# Altium PCB UKU205.PcbDoc (part 1 of 3)
Units mm, origin at the board's own origin, x right, y up, seen from the top; angles counter-clockwise.
Board outline 374.65 x 264.35 mm, 2 copper layers (Top Layer, Bottom Layer); 276 components, 443 nets, 1000 pads, 796 vias.
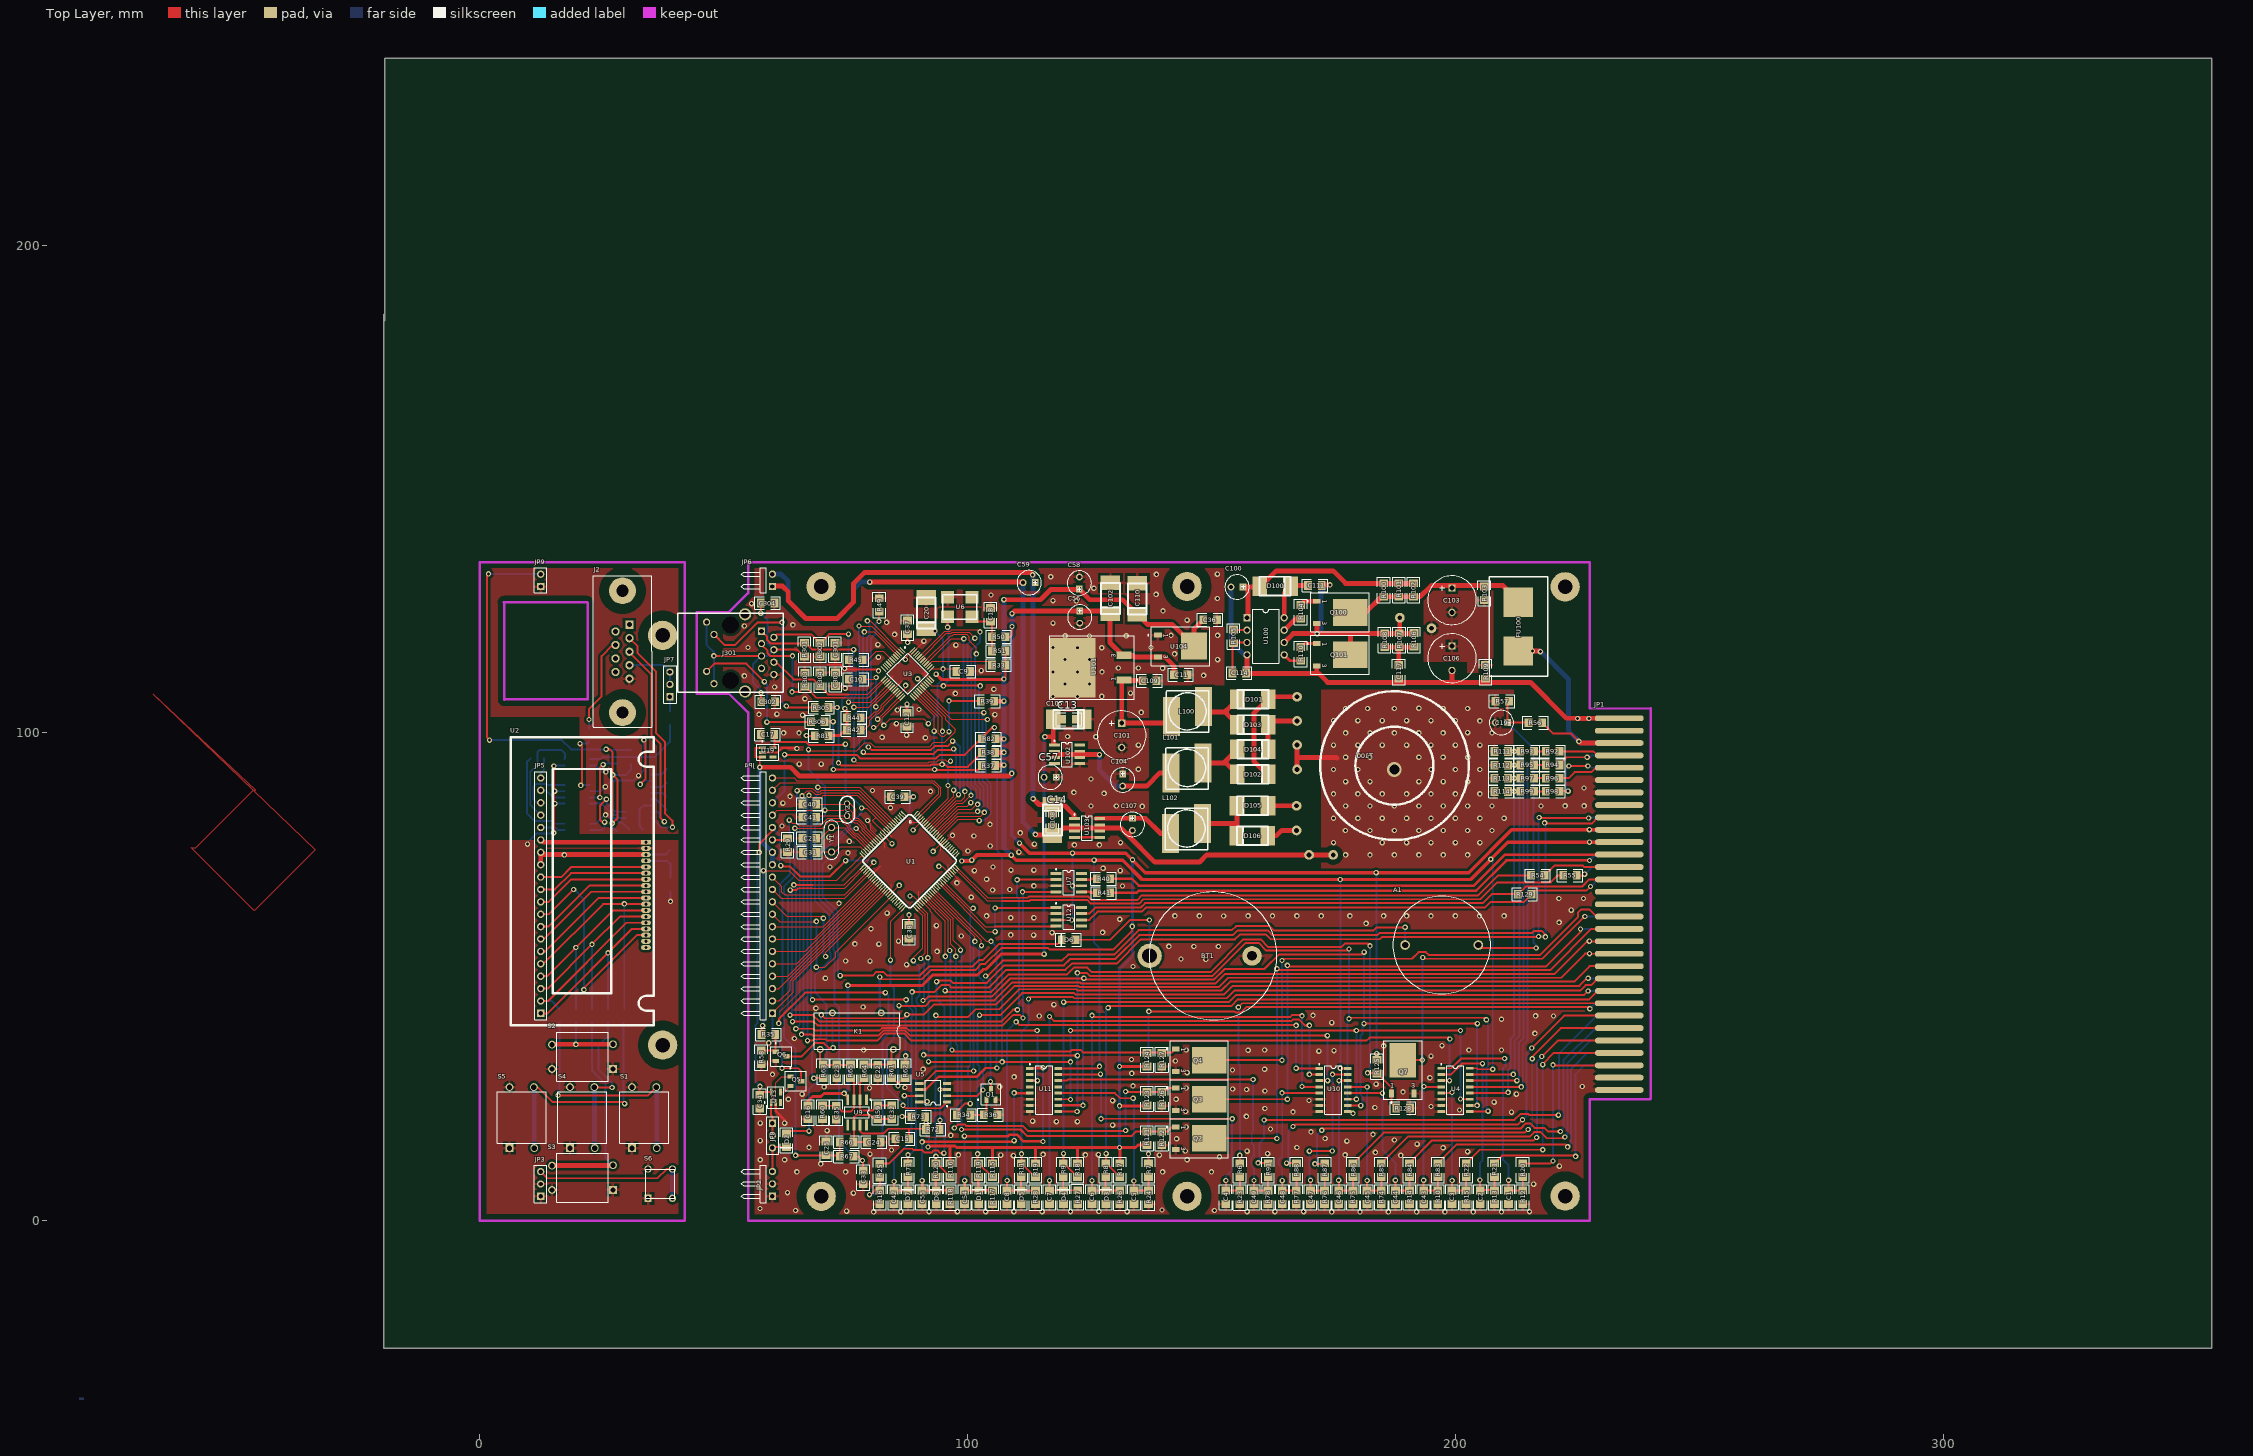
[diagram p0: Top Layer view]
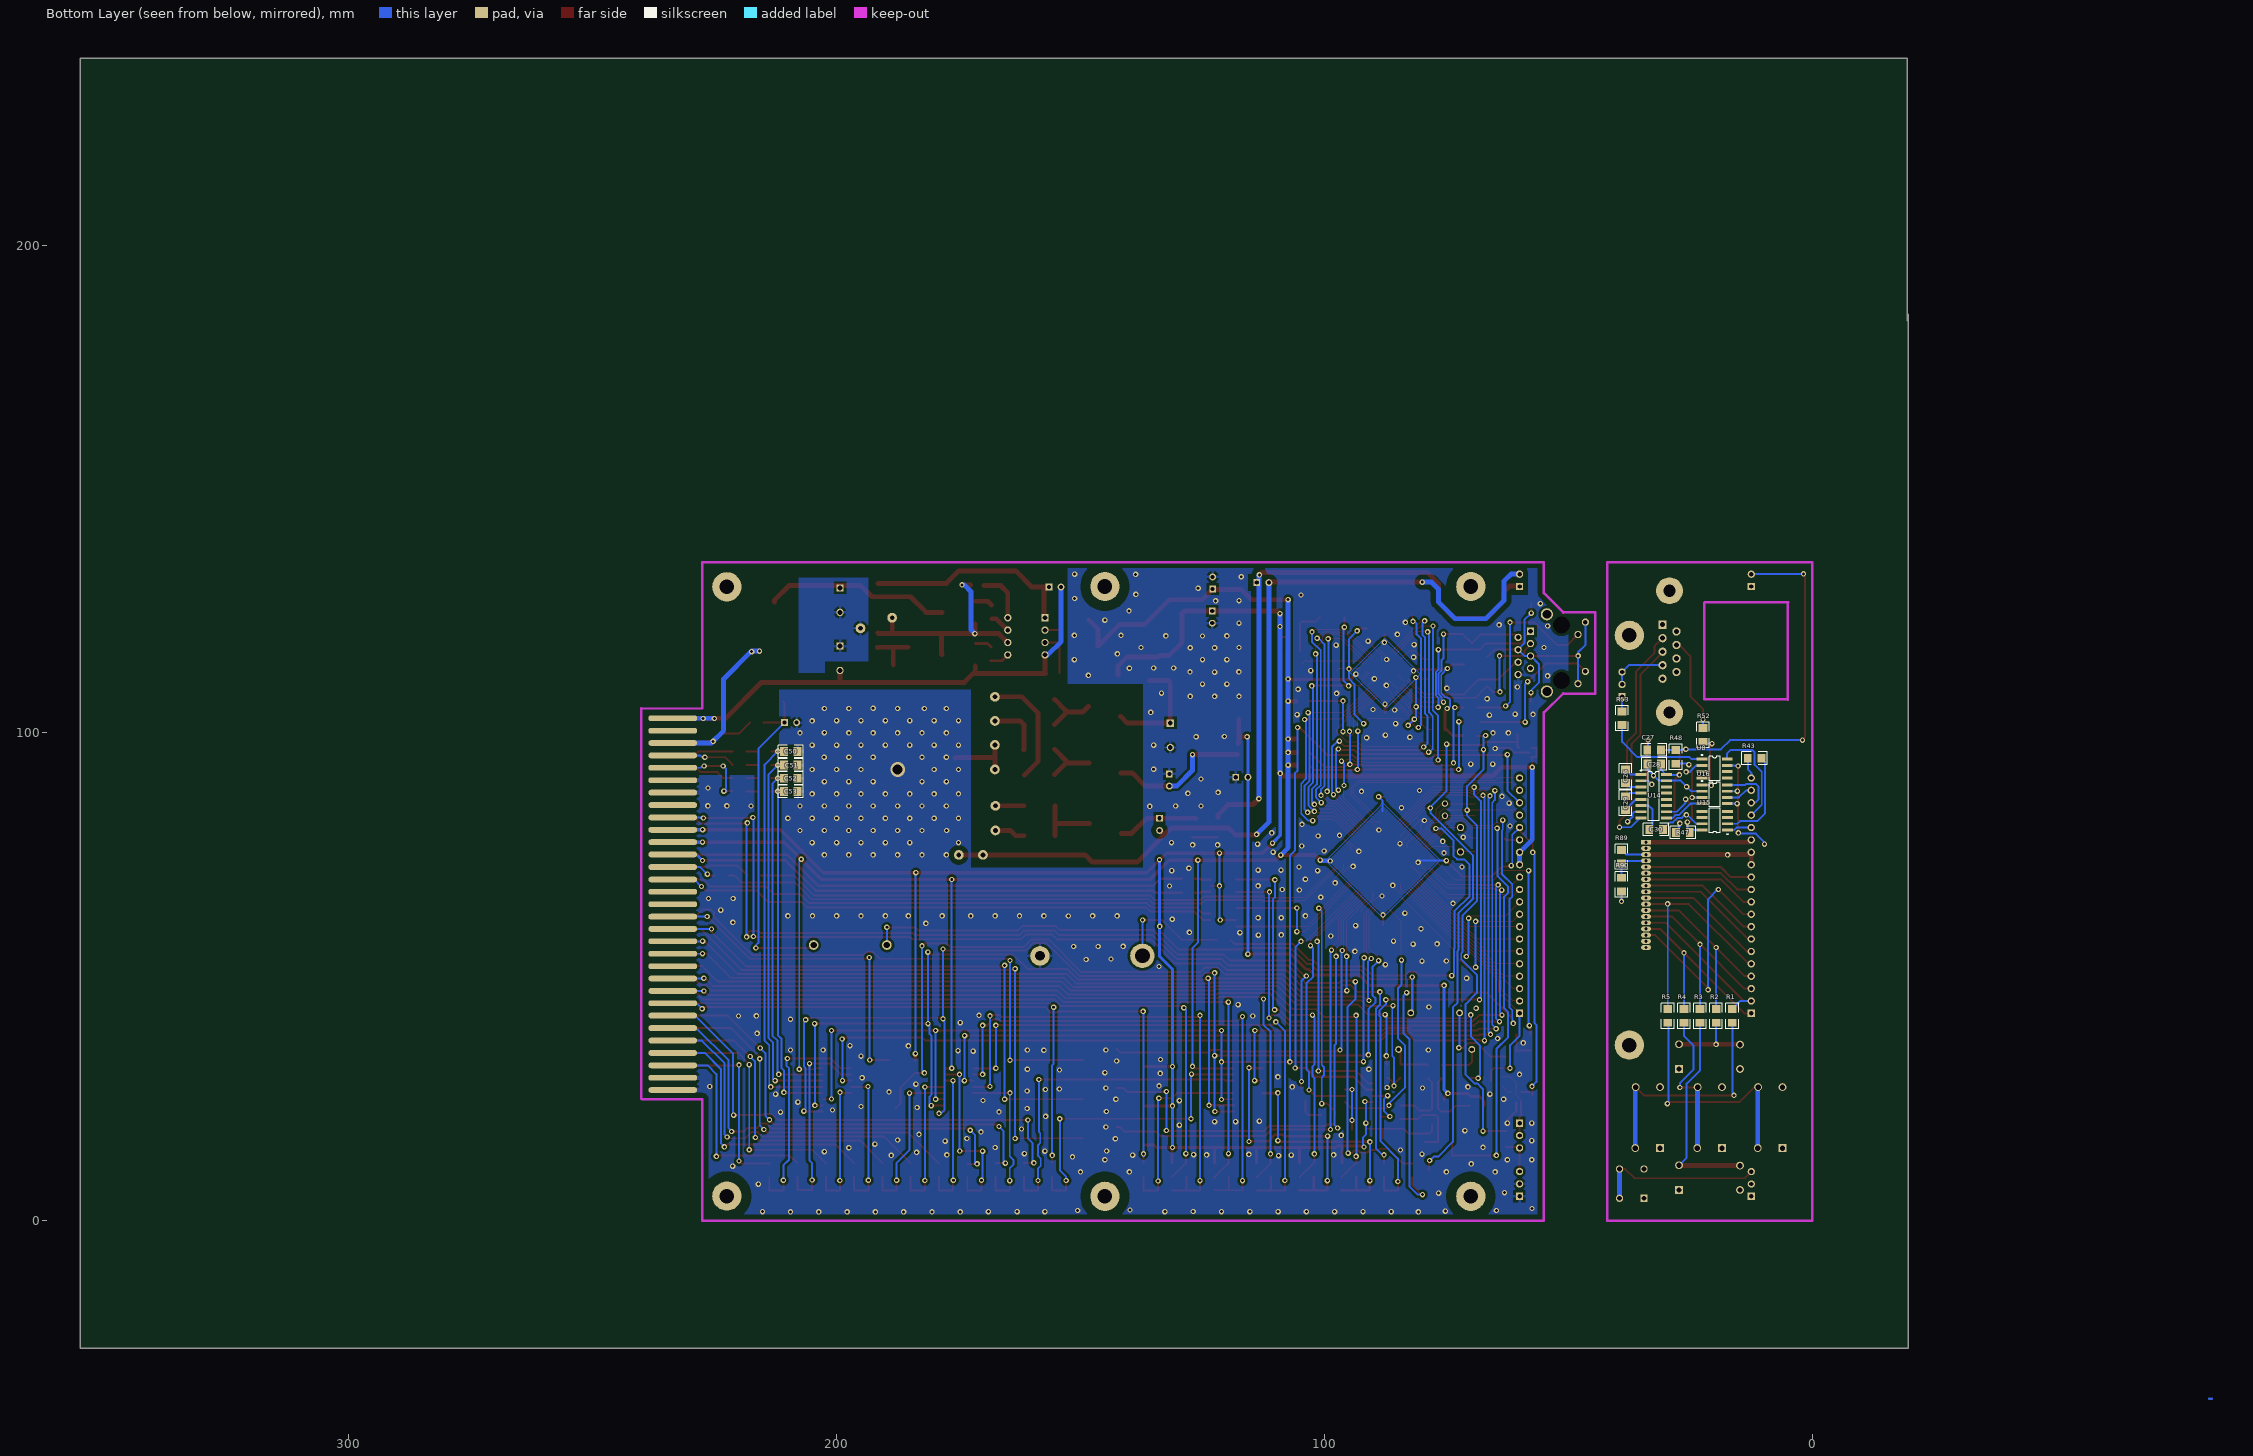
[diagram p1: Bottom Layer view, seen from below]

## Layer stack, top to bottom
Top Layer: signal copper 0.0356
Dielectric: dielectric 0.32, FR-4, Dk 4.8
Bottom Layer: signal copper 0.0356

## Board outline
-19.65,185.8 -19.65,-26.1 355,-26.1 355,238.25 -19.45,238.25 -19.45,184.45

## Design rules (kind name [scope] priority, off if disabled: settings)
Clearance Clearance_1 [InPoly vs InNet('+5VIZ') Or InNet('-5VIZ')] p1: gap=1
Clearance "Для разъёма" [InComponent(JP1)] p2: gap=0.6
Clearance Poly_Poly [InPoly vs InPoly] p3: gap=1
Clearance Keep_Out [OnLayer('Keep-Out Layer') vs Not InNet('NetJ2_5')] p4: gap=1
Clearance Holes [InPoly vs HasPad('Free-0')  Or HasPad('J2-10')  Or HasPad('J2-11')] p5: gap=2
Clearance Poly [InPoly] p6: gap=0.5
Clearance [All] p7: gap=0.15
Clearance Высоковольтное [InNet('+UOUT') or
InNet('U1') or
InNet('U2') or
InNet('UAKB') or
InNet('-UOUT') vs InPoly] p8: gap=0.6
ComponentClearance [All] p1: gap=0.254 collisioncheckmode=0
HoleSize [All] p1: absolutevalues=TRUE maxlimit=5 minlimit=0.025 maxpercent=80.000 minpercent=20.000
PolygonConnect PolygonConnect_2 [InComponent(JP1)] p1: connectstyle=Relief reliefconductorwidth=1 reliefentries=4 polygonreliefangle="90 Angle"
PolygonConnect PolygonConnect_1 [HasPad('JP101-7') or
HasPad('JP6-7') or
HasPad('JP6-9') or
HasPad('JP6-10') Or InComponent(U101)] p2: connectstyle=Direct reliefconductorwidth=0.254 reliefentries=4 polygonreliefangle="90 Angle"
PolygonConnect [All] p3: connectstyle=Relief reliefconductorwidth=0.5 reliefentries=4 polygonreliefangle="90 Angle"
RoutingLayers [All] p1: top layer=Horizontal bottom layer=Vertical
RoutingVias [All] p1: holewidth=0.6 width=1.1 viastyle="Through Hole" minholewidth=0.6 minwidth=1.1 maxholewidth=0.7 maxwidth=1.2
SolderMaskExpansion [All] p1: expansion=0.102
TestPointUsage [All] p1: valid=0 allowmultiple=FALSE
Testpoint [All] p1: side=15 testpointundercomponent=TRUE minsize=1.016 maxsize=2.54 preferedsize=1.524 minholesize=0 maxholesize=1.016 preferedholesize=0.813 testpointgrid=0.025 style=1023 order=1234567890
Width [All] p1: maxlimit=2 minlimit=0.2 preferedwidth=0.254 toplayer_prefwidth=0.3 bottomlayer_prefwidth=0.4 minimp=50.000000 maximp=50.000000 favimp=50.000000
15 further rules are at their usual default settings.

## Classes and differential pairs
component class ANALOG_: C1 C2 C3 C4 C5 C6 C7 C8 C42 C43 C44 C45 C46 C47 C48 C49 C50 C51 C52 C53 C54 C55 D1 D3 D4 D5 D7 D8 Q2 Q3 Q4 Q7 R6 R7 R8 R9 R10 R11 R12 R13 R14 R15 R16 R17 R18 R19 R20 R21 R22 R23 R24 R25 R26 R27 R28 R71 R74 R75 R76 R77 R78 R83 R84 R85 R86 R87 R88 R91 R92 R93 R94 R95 R96 R97 R98 R99 R111 R112 R113 R114 R115 R116 R117 R118 R119 R120 R121 R122 R123 R124 R125 R126 R127 R128 U4 U10 U11
component class RS232: R72 R73 U5
component class FACE: C26 C27 C28 C29 C30 J2 JP3 JP5 JP7 JP9 R1 R2 R3 R4 R5 R43 R47 R48 R52 R53 R89 R90 S1 S2 S3 S4 S5 S6 TX0 U2 U8 U14 U15 U16
component class cpu_board: A1 C15 C16 C17 C19 C21 C22 C23 C24 C25 C31 C32 C33 C34 C35 C37 C38 C39 C40 C41 D2 JP1 JP2 JP4 JP6 JP8 K1 Q1 Q5 Q6 R29 R34 R35 R36 R40 R41 R54 R55 R56 R57 R58 R59 R60 R61 R62 R63 R64 R65 R66 R67 R81 R82 R129 U1 U7 U9 U12 U13 U19 Y1 Y2
component class POWER: BT1 C11 C13 C14 C36 C56 C57 C58 C59 C100 C101 C102 C103 C104 C105 C106 C107 C108 C109 C110 C111 C114 C117 D6 D100 D101 D102 D103 D104 D105 D106 FU100 L100 L101 L102 Q100 Q101 R100 R101 R102 R103 R104 R105 R106 R107 R108 R109 R110 T100 U100 U101 U102 U103 U104
component class ETHERNET: C9 C10 C12 C18 C20 C301 C302 C303 C304 J301 R33 R37 R38 R39 R42 R44 R45 R49 R50 R51 R301 R302 R303 R304 R305 R306 U3 U6

## Components (designator, comment, footprint, x,y, rotation, side; value= is the part's Value field where it differs from the comment)
A1 "EFM-260" Pjezo15 192.2,56.5 r0 top
BT1 "CR2032" BAT_SUPP 150.3,54.3 r90 top
C1 "1.0" C3216-1206#1 210.9,4.8 r270 top
C2 "1.0" C3216-1206#1 205.1,4.8 r270 top
C3 "1.0" C3216-1206#1 199.3,4.8 r270 top
C4 "1.0" C3216-1206#1 152.9,4.8 r270 top
C5 "1.0" C3216-1206#1 134.1,4.8 r270 top
C6 "1.0" C3216-1206#2 125.5,4.8 r270 top
C7 "1.0" C3216-1206#2 116.8,4.8 r270 top
C8 "1.0" _1206#1 108.1,4.8 r270 top
C9 "0.1" C3216-1206#1 99.1,112.6 r0 top
C10 "0.1" C3216-1206#1 77.1,111 r180 top
C11 "1.0" C3216-1206#3 143.7,111.9 r180 top
C12 "0.1" _1206#2 87.6,102.7 r270 top
C13 "1.0" C3216-1206#3 120.8,102.8 r0 top
C14 "1.0" C3216-1206#3 117.4,82.1 r90 top
C15 "1.0" C3216-1206#1 86.6,16.8 r0 top
C16 "1.0" C3216-1206#1 67.3,22.2 r90 top
C17 "1.0" _1206#2 59,99.7 r0 top
C18 "0.1" _1206#2 104.7,124.2 r90 top
C19 "22.0x50" el3 210.7,102.1 r180 top
C20 "10.0x25 tantal" CAP_EL_6_3#1 91.5,121.4 r90 top
C21 "10" _1206#2 67.6,78.4 r0 top
C22 "1.0" _1206#2 81.6,30.6 r90 top
C23 "1.0" _1206#2 73.2,30.6 r270 top
C24 "1.0" _1206#2 80.8,16.1 r180 top
C25 "1.0" _1206#2 71,14.8 r270 top
C26 "1.0" C3216-1206#1 38.3,91.1 r90 bottom
C27 "1.0" _1206#2 32.4,96.5 r180 bottom
C28 "1.0" C3216-1206#1 32.4,93.6 r0 bottom
C29 "1.0" C3216-1206#1 38.3,85.6 r270 bottom
C30 "1.0" C3216-1206#1 32,80.2 r180 bottom
C31 "10" _1206#2 67.65,75.501 r0 top
C32 "0.1" _1206#2 84.45,22.25 r270 top
C33 "1.0" _1206#2 78.6,8.9 r90 top
C34 "1.0" _1206#1 57.4,24.4 r270 top
C35 "0.1" _1206#2 73.1,22.15 r270 top
C36 "0.1" C3216-1206#3 149.7,123.2 r180 top
C37 "1.0" _1206#2 87.7,121.6 r270 top
C38 "1.0" _1206#2 88,59.2 r90 top
C39 "1.0" _1206#2 85.7,86.9 r0 top
C40 "33" _1206#2 67.6,85.4 r0 top
C41 "33" _1206#2 67.6,82.7 r0 top
C42 "1n0" _1206#2 84.9,4.8 r270 top
C43 "1.0" C3216-1206#3 193.5,4.8 r270 top
C44 "1.0" C3216-1206#3 187.7,4.8 r270 top
C45 "1.0" C3216-1206#3 181.9,4.8 r270 top
C46 "1.0" C3216-1206#3 176.1,4.8 r270 top
C47 "1.0" C3216-1206#3 170.3,4.8 r270 top
C48 "1.0" C3216-1206#3 164.5,4.8 r270 top
C49 "1.0" C3216-1206#3 158.7,4.8 r270 top
C50 "1.0" C3216-1206#3 209.4,96.2 r180 bottom
C51 "1.0" C3216-1206#3 209.4,93.4 r180 bottom
C52 "1.0" C3216-1206#3 209.4,90.7 r180 bottom
C53 "1.0" C3216-1206#3 209.4,88 r180 bottom
C54 "1.0" _1206#1 99.4,4.8 r270 top
C55 "1.0" _1206#1 90.7,4.8 r270 top
C56 "22.0 x 35" el3 123,125 r270 top
C57 "22.0 x 35" el3 118.2,90.9 r180 top
C58 "22.0 x 35" el3 122.899,129.45 r90 top
C59 "22.0 x 35" el3 113.9,130.791 r180 top
C100 "22.0x50" el3 156.5,129.9 r180 top
C101 "220.0x25" el5 131.6,97 r90 top
C102 "10.0x25 tantal" CAP_EL_6_3#1 129.3,124.4 r90 top
C103 "220.0x63" el5 199.3,124.7 r90 top
C104 "22.0 x 35" el3 131.8,91.6 r270 top
C105 "10.0x25 tantal" CAP_EL_6_3#1 123.9,102.8 r180 top
C106 "220.0x63" el5 199.3,112.8 r90 top
C107 "22.0 x 35" el3 133.8,82.5 r270 top
C108 "10.0x25 tantal" CAP_EL_6_3#1 117.4,85.3 r270 top
C109 "0.1" C3216-1206#1 137.3,110.7 r180 top
C110 "10.0x25 tantal" CAP_EL_6_3#2 134.8,124.3 r90 top
C111 "0.1" C3216-1206#1 171.2,130.2 r0 top
C114 "1n0x1000" _1206#2 155.7,112.3 r0 top
C117 "1n0x1000" _1206#2 188.4,112.5 r270 top
C301 "0.1" C3216-1206#1 72.85,117.05 r270 top
C302 "0.1" C3216-1206#1 59.1,106.4 r180 top
C303 "0.1" C3216-1206#1 72.9,111 r90 top
C304 "0.1" C3216-1206#1 59,126.6 r180 top
D1 "BZV55-C5V6" _1206d#1 102.3,4.8 r270 top
D2 "LL4148" _1206d#2 62.9,16.5 r90 top
D3 "BZV55-C5V6" _1206d#1 128.4,4.8 r270 top
D4 "BZV55-C5V6" _1206d#1 119.7,4.8 r270 top
D5 "BZV55-C5V6" _1206d#1 111,4.8 r270 top
D6 "LL4148" _1206d#2 120.7,57.6 r0 top
D7 "BZV55-C3V9" _1206d#2 87.8,4.8 r270 top
D8 "BZV55-C5V6" _1206d#1 93.6,4.8 r270 top
D100 "10BQ060" D_6_3 166.2,130.1 r180 top
D101 "10BQ060" D_6_3 155.318,106.863 r0 top
D102 "10BQ060" D_6_3 161.65,91.487 r180 top
D103 "10BQ060" D_6_3 155.318,101.7 r0 top
D104 "10BQ060" D_6_3 161.65,96.65 r180 top
D105 "10BQ060" D_6_3 155.25,85.1 r0 top
D106 "10BQ060" D_6_3 155.2,78.9 r0 top
FU100 "5A(2Б-1В)" FUSE2 212.9,121.8 r90 top
J2 "DBS-9M" DSUB_N9 30.8,116.7 r270 top
J301 "J0011D21B" J0011D21B 51.4,116.4 r90 top
JP1 "Header 31X2" sl-62f 233.6,103 r270 top
JP2 "Header 3H" HDR1X3H 60,5 r90 top
JP3 "Header 3" HDR1X3#1 12.5,5 r90 top
JP4 "Header 20H" HDR1X20H 60,42.5 r90 top
JP5 "Header 20" HDR1X20 12.5,42.5 r90 top
JP6 "Header 2H" HDR1X2H 60,130 r90 top
JP7 "PLS-3" HDR1X3#1 39,107.4 r90 top
JP8 "PLS-3" HDR1X3#2 60,20 r270 top
JP9 "Header 2" HDR1X2 12.5,130 r90 top
K1 "DH1A" kuan 84.8,42.6 r180 top
L100 "SDR0805-390KL" L10x10 140,109.5 r270 top
L101 "SDR0805-390KL" L10x10 139.9,97.9 r270 top
L102 "SDR0805-390KL" L10x10 139.8,85.5 r270 top
Q1 "BC846" SO-G3#1 104.8,25.9 r0 top
Q2 "IRLR120" SIP-G3/E8#1 146.1,16.9 r270 top
Q3 "IRLR120" SIP-G3/E8#1 146.1,24.9 r270 top
Q4 "IRLR120" SIP-G3/E8#1 146.1,32.9 r270 top
Q5 "IRLML2402" SO-G3#2 64.8,28.6 r270 top
Q6 "BC846" SO-G3#1 61.8,33.7 r270 top
Q7 "IRLR120" SIP-G3/E8#1 189.2,29.5 r0 top
Q100 "IRFR120" SIP-G3/E8#2 175,124.7 r270 top
Q101 "IRFR120" SIP-G3/E8#2 175,116 r270 top
R1 "2K7" _1206#2 16.4,42 r90 bottom
R2 "2K7" _1206#2 19.708,42 r90 bottom
R3 "2K7" _1206#2 23.016,42 r90 bottom
R4 "2K7" _1206#2 26.324,42 r90 bottom
R5 "2K7" _1206#2 29.632,42 r90 bottom
R6 "2K7" _1206#2 155.8,10.4 r90 top
R7 "2K7" _1206#2 137.1,10.4 r90 top
R8 "2K7" _1206#1 128.3,10.4 r90 top
R9 "2K7" _1206#1 119.6,10.4 r90 top
R10 "1K0" _1206#1 196.4,4.8 r270 top
R11 "2K7" _1206#1 111,10.4 r90 top
R12 "1K0" _1206#2 213.8,4.8 r270 top
R13 "1K0" _1206#2 208,4.8 r270 top
R14 "1K0" _1206#1 190.6,4.8 r270 top
R15 "1K0" _1206#2 202.2,4.8 r270 top
R16 "1K0" _1206#2 82,4.8 r270 top
R17 "1K0" _1206#1 131.2,10.4 r90 top
R18 "1K0" _1206#1 122.5,10.4 r90 top
R19 "1K0" _1206#1 113.9,10.4 r90 top
R20 "33K" _1206#2 213.8,10.4 r90 top
R21 "33K" _1206#2 208,10.4 r90 top
R22 "33K" _1206#2 202.2,10.4 r90 top
R23 "10K" _1206#2 155.8,4.8 r90 top
R24 "10K" _1206#2 137.1,4.8 r90 top
R25 "10K" _1206#2 82,10.3 r90 top
R26 "10K" _1206#1 131.2,4.8 r90 top
R27 "10K" _1206#1 122.55,4.85 r90 top
R28 "10K" _1206#1 113.9,4.8 r90 top
R29 "10R" _1206#1 63.1,77 r90 top
R33 "2K2" _1206#2 106.4,113.9 r0 top
R34 "1K0" _1206#2 99.2,21.7 r0 top
R35 "1K0" _1206#2 59.2,38.2 r0 top
R36 "10K" _1206#2 104.7,21.7 r180 top
R37 "2K2" _1206#2 104.3,93.3 r0 top
R38 "2K2" _1206#2 104.3,96 r0 top
R39 "2K2" _1206#2 104.1,106.5 r0 top
R40 "K10" _1206#2 127.85,70.1 r180 top
R41 "K10" _1206#2 127.85,67.2 r180 top
R42 "2K2" _1206#2 76.7,100.6 r180 top
R43 "K20" _1206#2 11.8,94.8 r180 bottom
R44 "2K2" _1206#2 76.7,103.1 r180 top
R45 "10K" _1206#2 77.1,115 r180 top
R47 "1K0" _1206#2 26.5,79.6 r180 bottom
R48 "K20" _1206#2 28,95.1 r90 bottom
R49 "4K87" _1206#2 81.9,126.2 r270 top
R50 "1R" _1206#2 106.4,119.7 r0 top
R51 "1R" _1206#2 106.4,116.8 r0 top
R52 "1K0" _1206#2 22.4,99.6 r90 bottom
R53 "1K0" _1206#2 39,103 r90 bottom
R54 "1K0" _1206#2 216.9,70.8 r0 top
R55 "1K0" _1206#2 223.5,70.8 r0 top
R56 "10K" _1206#2 216.4,102.1 r0 top
R57 "2K7" _1206#2 209.6,106.5 r0 top
R58 "10K" _1206#2 57.7,33.5 r90 top
R59 "20K" _1206#2 81.6,22.25 r90 top
R60 "20K" _1206#2 70.25,22.2 r90 top
R61 "10R" _1206#2 84.4,30.6 r270 top
R62 "10R" _1206#2 87.2,30.6 r270 top
R63 "10R" _1206#2 70.4,30.6 r270 top
R64 "2K0" _1206#2 78.8,30.6 r270 top
R65 "2K0" _1206#2 76,30.6 r270 top
R66 "20K" _1206#2 75.2,16.1 r180 top
R67 "20K" _1206#2 75.2,13.2 r0 top
R71 "2K7" _1206#2 87.8,10.4 r90 top
R72 "2K7" _1206#1 92.9,18.7 r180 top
R73 "2K7" _1206#1 89.9,21.3 r180 top
R74 "1K0" _1206#1 184.8,4.8 r270 top
R75 "1K0" _1206#1 179,4.8 r270 top
R76 "1K0" _1206#1 173.2,4.8 r270 top
R77 "1K0" _1206#1 167.4,4.8 r270 top
R78 "1K0" _1206#1 161.6,4.8 r270 top
R81 "10K" _1206#2 70.1,99.4 r0 top
R82 "10K" _1206#2 104.3,98.8 r180 top
R83 "33K" _1206#1 196.4,10.4 r90 top
R84 "33K" _1206#1 190.6,10.4 r90 top
R85 "33K" _1206#1 184.8,10.4 r90 top
R86 "33K" _1206#1 179,10.4 r90 top
R87 "33K" _1206#1 173.2,10.4 r90 top
R88 "33K" _1206#1 167.4,10.4 r90 top
R89 "7K5" _1206#2 39.1,74.6 r270 bottom
R90 "2K2" _1206#2 39.1,68.9 r270 bottom
R91 "33K" _1206#1 161.6,10.4 r90 top
R92 "6K2" _1206#1 219.9,96.2 r180 top
R93 "6K2" _1206#1 214.7,96.2 r180 top
R94 "6K2" _1206#1 219.9,93.4 r180 top
R95 "6K2" _1206#1 214.7,93.4 r180 top
R96 "6K2" _1206#1 219.9,90.7 r180 top
R97 "6K2" _1206#1 214.7,90.7 r180 top
R98 "6K2" _1206#1 219.9,88 r180 top
R99 "6K2" _1206#1 214.7,88 r180 top
R100 "33K" _1206#2 185.299,129.3 r90 top
R101 "33K" _1206#2 188.4,129.3 r90 top
R102 "33K" _1206#2 191.4,129.3 r90 top
R103 "20K" _1206#2 205.9,128.6 r270 top
R104 "22R" _1206#2 168.3,124.8 r90 top
R105 "15K" _1206#2 154.5,119.8 r90 top
R106 "30R" _1206#2 191.501,119.05 r270 top
R107 "30R" _1206#2 188.5,119 r270 top
R108 "30R" _1206#2 185.5,119 r270 top
R109 "20K" _1206#2 206.2,112.5 r270 top
R110 "22R" _1206#2 168.3,116.2 r90 top
R111 "1K0" _1206#1 209.4,96.2 r0 top
R112 "1K0" _1206#1 209.4,93.4 r0 top
R113 "1K0" _1206#1 209.4,90.7 r0 top
R114 "1K0" _1206#1 209.4,88 r0 top
R115 "1K0" _1206#1 105.1,10.4 r90 top
R116 "1K0" _1206#1 96.4,10.4 r90 top
R117 "10K" _1206#1 105.1,4.8 r90 top
R118 "10K" _1206#1 96.4,4.8 r90 top
R119 "2K7" _1206#1 102.2,10.4 r90 top
R120 "2K7" _1206#1 93.5,10.4 r90 top
R121 "1K0" _1206#1 136.8,16.9 r270 top
R122 "10K" _1206#1 139.8,16.9 r270 top
R123 "1K0" _1206#1 136.8,25 r270 top
R124 "1K0" _1206#1 136.8,33 r270 top
R125 "1K0" _1206#1 183.9,31.6 r90 top
R126 "10K" _1206#1 139.8,25 r270 top
R127 "10K" _1206#1 139.8,33 r270 top
R128 "10K" _1206#1 189.3,23.1 r0 top
R129 "K10" _1206#2 214.2,66.9 r180 top
R301 "49.9R" _1206#2 66.55,117.05 r270 top
R302 "49.9R" _1206#2 69.75,117.05 r90 top
R303 "49.9R" _1206#2 66.65,110.95 r90 top
R304 "49.9R" _1206#2 69.75,110.95 r270 top
R305 "K10" _1206#2 70.1,105.2 r0 top
R306 "K10" _1206#2 69.3,102.3 r0 top
S1 "SWT-9" SWT-9 31.2,14.9 r90 top
S2 "SWT-9" SWT-9 27.3,31.1 r180 top
S3 "SWT-9" SWT-9 27.3,6.3 r180 top
S4 "SWT-9" SWT-9 18.5,14.9 r90 top
S5 "SWT-9" SWT-9 6.1,14.9 r90 top
S6 "SWT-6" SWT-6 34.5,4.6 r90 top
T100 "T-UKU202-60/48" trans_ring1 187.5,93.3 r0 top
U1 "LPC2368FBD100" LPC2368 88.1,73.7 r225 top
U2 "WG1232D" WG1232D 21,69.6 r270 top
U3 "DP8348C" F-QFP7X7-G48/N 87.7,112.1 r315 top
U4 "MC14051BD" SO-G16/C5.85#1 200,26.8 r270 top
U5 "25LC640" SO-G8/D5 92.95,26.25 r90 top
U6 "KXO-97-50MGz" KXO-97 98.4,125.8 r180 top
U7 "UCC37324" SO-G8#1 120.75,69.3 r270 top
U8 "MOCD217" SO-G8#1 20,92.7 r270 bottom
U9 "OP07CS" SO-G8#1 77.35,22.2 r180 top
U10 "MC14051BD" SO-G16/C5.85#2 175,26.8 r270 top (schematic designator U?)
U11 "MC14051BD" SO-G16/C5.85#2 115.7,26.8 r270 top
U12 "TJA1050" SO-G8#1 120.75,62.3 r270 top
U13 "TPS3823" SO-G5/P.95#1 60.7,25.3 r0 top
U14 "MAX232ESE" SO-G16 32.5,87 r270 bottom
U15 "MOCD217" SO-G8#1 20,82 r90 bottom
U16 "MOCD217" SO-G8#1 20,87.4 r270 bottom
U19 "TPS76333" SO-G5/P.95#2 59,96 r270 top
U100 "IR2155" DIP-8/D11 161.1,119.8 r270 top
U101 "7805" D2PAK 126.8,113.4 r90 top
U102 "L79L05ACD" SO-G8#2 120.4,95.6 r270 top
U103 "MC78L05ACD" SO-G8#2 124.5,80.5 r270 top
U104 "REG1117-3.3" SIP-G3/C7.4 142.7,117.8 r270 top
Y1 "10MGz" QWARZ1 72.1,80.6 r270 top
Y2 "32768" QWARZ2 75.3,85.5 r270 top

## Footprints (in the part's own frame and the unit in brackets; to place one, negate y for a bottom-side part, rotate by r counter-clockwise, add the part's x,y. Pads: shape width x height; smd on the part's side, far side on the other; paste and mask are expansions set on the pad)
_1206#1 [mm]
  rect 1.6x1.8 smd: 1(-1.409,-0.014) 2(1.391,-0.014)
  silkscreen extent -2.61,-1.31 2.59,1.29
_1206#2 [mm]
  rect 1.6x1.8 smd: 1(-1.412,-0.007) 2(1.388,-0.007)
  silkscreen extent -2.61,-1.31 2.59,1.29
_1206d#1 [mm]
  rect 1.6x1.8 smd: 1(1.403,-0.017) 2(-1.397,-0.017)
  silkscreen extent -2.6,-1.32 2.6,1.28
_1206d#2 [mm]
  rect 1.6x1.8 smd: 1(1.395,-0.009) 2(-1.405,-0.009)
  silkscreen extent -2.6,-1.31 2.6,1.29
BAT_SUPP [mm]
  round 5 hole 3: 1(-0.009,12.995)
  round 4 hole 2: 2(-0.009,-8.005)
  silkscreen extent -13.11,-13.11 13.09,13.09
C3216-1206#1 [mm]
  rect 1.6x1.8 smd: 1(-1.405,0.002) 2(1.395,0.002)
  silkscreen extent -2.6,-1.3 2.6,1.3
C3216-1206#2 [mm]
  rect 1.6x1.8 smd: 1(-1.405,-0.006) 2(1.395,-0.006)
  silkscreen extent -2.6,-1.31 2.6,1.29
C3216-1206#3 [mm]
  rect 1.6x1.8 smd: 1(-1.4,0) 2(1.4,0)
  silkscreen extent -2.6,-1.3 2.6,1.3
CAP_EL_6_3#1 [mm]
  rect 3x4 smd: 1(-0.011,0.006) 2(6.339,0.006)
  silkscreen extent -0.01,-1.9 6.34,1.91
CAP_EL_6_3#2 [mm]
  rect 3x4 smd: 1(0.001,0.015) 2(6.351,0.015)
  silkscreen extent 0,-1.89 6.35,1.92
D2PAK [mm]
  rect 1.5x3 smd: 1(-2.558,-5.253) 3(2.522,-5.253)
  rect 12.2x9.3 smd mask+0.5: 4(-0.018,5.247)
  silkscreen extent -6.52,-8.1 6.48,10
D_6_3 [mm]
  rect 3x4 smd: 1(6.341,0.006) 2(-0.009,0.006)
  silkscreen extent -0.01,-1.9 6.34,1.91
DIP-8/D11 [mm]
  rect 1.5x1.5 hole 0.95: 1(-3.803,-3.816)
  round 1.5 hole 0.95: 2(-1.263,-3.816) 3(1.277,-3.816) 4(3.817,-3.816) 5(3.817,3.804) 6(1.277,3.804) 7(-1.263,3.804) 8(-3.803,3.804)
  silkscreen extent -5.49,-2.66 5.51,2.64
DSUB_N9 [mm]
  rect 1.69x1.69 hole 1: 1(-5.481,-0.116)
  round 1.69 hole 1: 2(-2.711,-0.116) 3(0.059,-0.116) 4(2.829,-0.116) 5(5.599,-0.116) 6(-4.096,-2.956) 7(-1.326,-2.956) 8(1.444,-2.956) 9(4.214,-2.956)
  round 5.5 hole 2.5: 10(-12.436,-1.536) 11(12.554,-1.536)
  silkscreen extent -15.49,-7.51 15.51,4.49
el3 [mm]
  rect 1.4x1.4 hole 0.85: 1(0.011,-0.008)
  round 1.4 hole 0.85: 2(2.511,-0.008)
  silkscreen extent -1.24,-2.51 3.76,2.49
el5 [mm]
  rect 1.5x1.5 hole 1: 1(5.001,0.007)
  round 1.5 hole 1: 2(0.001,0.007)
  silkscreen extent -2.5,-4.99 7.5,5
F-QFP7X7-G48/N [mm]
  rect 1.55x0.3 smd: 1(-4.192,2.749) 2(-4.192,2.249) 3(-4.192,1.749) 4(-4.192,1.249) 5(-4.192,0.749) 6(-4.192,0.249) 7(-4.192,-0.251) 8(-4.192,-0.751) 9(-4.192,-1.251) 10(-4.192,-1.751) 11(-4.192,-2.251) 12(-4.192,-2.751) 25(4.158,-2.751) 26(4.158,-2.251) 27(4.158,-1.751) 28(4.158,-1.251) 29(4.158,-0.751) 30(4.158,-0.251) 31(4.158,0.249) 32(4.158,0.749) 33(4.158,1.249) 34(4.158,1.749) 35(4.158,2.249) 36(4.158,2.749)
  rect 0.3x1.55 smd: 13(-2.767,-4.176) 14(-2.267,-4.176) 15(-1.767,-4.176) 16(-1.267,-4.176) 17(-0.767,-4.176) 18(-0.267,-4.176) 19(0.233,-4.176) 20(0.733,-4.176) 21(1.233,-4.176) 22(1.733,-4.176) 23(2.233,-4.176) 24(2.733,-4.176) 37(2.733,4.174) 38(2.233,4.174) 39(1.733,4.174) 40(1.233,4.174) 41(0.733,4.174) 42(0.233,4.174) 43(-0.267,4.174) 44(-0.767,4.174) 45(-1.267,4.174) 46(-1.767,4.174) 47(-2.267,4.174) 48(-2.767,4.174)
  silkscreen extent -4.32,-3 2.98,3.57
FUSE2 [mm]
  rect 6x6 smd: 1(-4.999,-0.006) 2(5.001,-0.006)
  silkscreen extent -10.16,-6.01 10.16,5.99
HDR1X2 [mm]
  rect 1.5x1.5 hole 0.9: 1(-0.005,0.012)
  round 1.5 hole 0.9: 2(2.535,0.012)
  silkscreen extent -1.28,-1.26 3.8,1.28
HDR1X2H [mm]
  rect 1.5x1.5 hole 0.9: 1(0,0)
  round 1.5 hole 0.9: 2(2.54,0)
  silkscreen extent -1.27,1.27 3.81,6.35
HDR1X3#1 [mm]
  rect 1.5x1.5 hole 0.9: 1(-0.009,0.011)
  round 1.5 hole 0.9: 2(2.531,0.011) 3(5.071,0.011)
  silkscreen extent -1.28,-1.26 6.34,1.28
HDR1X3#2 [mm]
  rect 1.5x1.5 hole 0.9: 1(0,0)
  round 1.5 hole 0.9: 2(2.54,0) 3(5.08,0)
  silkscreen extent -1.27,-1.27 6.35,1.27
HDR1X3H [mm]
  rect 1.5x1.5 hole 0.9: 1(0,0)
  round 1.5 hole 0.9: 2(2.54,0) 3(5.08,0)
  silkscreen extent -1.27,1.27 6.35,6.35
HDR1X20 [mm]
  rect 1.5x1.5 hole 0.9: 1(0,0)
  round 1.5 hole 0.9: 2(2.54,0) 3(5.08,0) 4(7.62,0) 5(10.16,0) 6(12.7,0) 7(15.24,0) 8(17.78,0) 9(20.32,0) 10(22.86,0) 11(25.4,0) 12(27.94,0) 13(30.48,0) 14(33.02,0) 15(35.56,0) 16(38.1,0) 17(40.64,0) 18(43.18,0) 19(45.72,0) 20(48.26,0)
  silkscreen extent -1.27,-1.27 49.53,1.27
HDR1X20H [mm]
  rect 1.5x1.5 hole 0.9: 1(0,0)
  round 1.5 hole 0.9: 2(2.54,0) 3(5.08,0) 4(7.62,0) 5(10.16,0) 6(12.7,0) 7(15.24,0) 8(17.78,0) 9(20.32,0) 10(22.86,0) 11(25.4,0) 12(27.94,0) 13(30.48,0) 14(33.02,0) 15(35.56,0) 16(38.1,0) 17(40.64,0) 18(43.18,0) 19(45.72,0) 20(48.26,0)
  silkscreen extent -1.27,1.27 49.53,6.35
J0011D21B [mm]
  round 2.5 hole 1.8: 0(-7.9,-3) 0(7.9,-3)
  round 1.5 hole 3.5: 0(-5.7,0) 0(5.7,0)
  rect 1.5x1.5 hole 0.95: 1(4.445,-6.35)
  round 1.5 hole 0.95: 2(3.175,-8.9) 3(1.905,-6.35) 4(0.635,-8.9) 5(-0.635,-6.35) 6(-1.905,-8.9) 7(-3.175,-6.35) 8(-4.445,-8.9) 9(6.31,4.9) 10(3.77,3.38) 11(-3.8,4.9) 12(-6.31,3.38)
  silkscreen extent -8.1,-10.8 8.1,10.8
kuan [mm]
  round 1.4 hole 0.85: 1(15.006,7.49) 3(0.006,7.49) 4(2.506,-0.01) 5(12.506,-0.01)
  silkscreen extent -1.34,-0.01 16.21,7.49
KXO-97 [mm]
  rect 2.7x2.5 smd: 1(-2.5,-2) 2(2.5,-2) 3(2.5,2) 4(-2.5,2)
  silkscreen extent -3.5,-2.5 3.5,2.5
L10x10 [mm]
  rect 8x3.5 smd: 1(4.075,8.372) 2(6.107,1.768)
  silkscreen extent 0.9,0.75 9.41,9.39
LPC2368 [mm]
  rect 0.25x1.5 smd: 1(-6,-7.775)
  oval 0.25x1.5 smd: 2(-5.5,-7.75) 3(-5,-7.75) 4(-4.5,-7.75) 5(-4,-7.75) 6(-3.5,-7.75) 7(-3,-7.75) 8(-2.5,-7.75) 9(-2,-7.75) 10(-1.5,-7.75) 11(-1,-7.75) 12(-0.5,-7.75) 13(0,-7.75) 14(0.5,-7.75) 15(1,-7.75) 16(1.5,-7.75) 17(2,-7.75) 18(2.5,-7.75) 19(3,-7.75) 20(3.5,-7.75) 21(4,-7.75) 22(4.5,-7.75) 23(5,-7.75) 24(5.5,-7.75) 25(6,-7.75) 51(6,7.75) 52(5.5,7.75) 53(5,7.75) 54(4.5,7.75) 55(4,7.75) 56(3.5,7.75) 57(3,7.75) 58(2.5,7.75) 59(2,7.75) 60(1.5,7.75) 61(1,7.75) 62(0.5,7.75) 63(0,7.75) 64(-0.5,7.75) 65(-1,7.75) 66(-1.5,7.75) 67(-2,7.75) 68(-2.5,7.75) 69(-3,7.75) 70(-3.5,7.75) 71(-4,7.75) 72(-4.5,7.75) 73(-5,7.75) 74(-5.5,7.75) 75(-6,7.75)
  oval 1.5x0.25 smd: 26(7.75,-6) 27(7.75,-5.5) 28(7.75,-5) 29(7.75,-4.5) 30(7.75,-4) 31(7.75,-3.5) 32(7.75,-3) 33(7.75,-2.5) 34(7.75,-2) 35(7.75,-1.5) 36(7.75,-1) 37(7.75,-0.5) 38(7.75,0) 39(7.75,0.5) 40(7.75,1) 41(7.75,1.5) 42(7.75,2) 43(7.75,2.5) 44(7.75,3) 45(7.75,3.5) 46(7.75,4) 47(7.75,4.5) 48(7.75,5) 49(7.75,5.5) 50(7.75,6) 76(-7.75,6) 77(-7.75,5.5) 78(-7.75,5) 79(-7.775,4.475) 80(-7.75,4) 81(-7.75,3.5) 82(-7.75,3) 83(-7.75,2.5) 84(-7.75,2) 85(-7.75,1.5) 86(-7.75,1) 87(-7.75,0.5) 88(-7.75,0) 89(-7.75,-0.5) 90(-7.75,-1) 91(-7.75,-1.5) 92(-7.75,-2) 93(-7.75,-2.5) 94(-7.775,-3.025) 95(-7.75,-3.5) 96(-7.75,-4) 97(-7.75,-4.5) 98(-7.75,-5) 99(-7.75,-5.5) 100(-7.75,-6)
  silkscreen extent -6.93,-6.93 6.93,6.93
Pjezo15 [mm]
  round 2 hole 1.3: 1(-2.503,0.012) 2(12.497,0.012)
  silkscreen extent -5.02,-10 15.01,10.02
QWARZ1 [mm]
  round 1.5 hole 1: 1(0.008,0) 2(5.008,0)
  silkscreen extent -1.49,-1.5 6.51,1.5
QWARZ2 [mm]
  round 1.3 hole 0.85: 1(0.001,0.005) 2(2.501,0.005)
  silkscreen extent -1.5,-1.5 4,1.5
SIP-G3/C7.4 [mm]
  rect 1x1.6 smd: 1(-2.243,-3.693) 3(2.257,-3.693)
  rect 5.5x5.4 smd: 4(0.007,3.707)
  silkscreen extent -3.99,-5.82 4.01,6.96
SIP-G3/E8#1 [mm]
  rect 1x1.6 smd: 1(-2.288,-3.429) 3(2.282,-3.429)
  rect 5.5x7.1 smd: 4(-0.003,3.421)
  silkscreen extent -4,-5.4 4,7.37
SIP-G3/E8#2 [mm]
  rect 1x1.6 smd: 1(-2.285,-3.431) 3(2.285,-3.431)
  rect 5.5x7.1 smd: 4(0,3.419)
  silkscreen extent -4,-5.41 4,7.37
sl-62f [mm]
  oval 1.2x10 smd: 1(0,-0.011) 3(2.55,-0.011) 5(5.075,-0.011) 7(7.625,-0.011) 9(10.15,-0.011) 11(12.675,-0.011) 13(15.25,-0.011) 15(17.8,-0.011) 17(20.325,-0.011) 19(22.875,-0.011) 21(25.4,-0.011) 23(27.925,-0.011) 25(30.5,-0.011) 27(33.05,-0.011) 29(35.575,-0.011) 31(38.125,-0.011) 33(40.65,-0.011) 35(43.175,-0.011) 37(45.7,-0.011) 39(48.275,-0.011) 41(50.825,-0.011) 43(53.35,-0.011) 45(55.9,-0.011) 47(58.425,-0.011) 49(60.95,-0.011) 51(63.525,-0.011) 53(66.075,-0.011) 55(68.6,-0.011) 57(71.15,-0.011) 59(73.675,-0.011) 61(76.2,-0.011)
  oval 1.2x10 smd far side: 2(0,-0.011) 4(2.55,-0.011) 6(5.075,-0.011) 8(7.625,-0.011) 10(10.15,-0.011) 12(12.7,-0.011) 14(15.25,-0.011) 16(17.8,-0.011) 18(20.325,-0.011) 20(22.875,-0.011) 22(25.4,-0.011) 24(27.925,-0.011) 26(30.5,-0.011) 28(33.05,-0.011) 30(35.575,-0.011) 32(38.125,-0.011) 34(40.675,-0.011) 36(43.175,-0.011) 38(45.725,-0.011) 40(48.275,-0.011) 42(50.825,-0.011) 44(53.35,-0.011) 46(55.9,-0.011) 48(58.425,-0.011) 50(60.95,-0.011) 52(63.525,-0.011) 54(66.075,-0.011) 56(68.6,-0.011) 58(71.15,-0.011) 60(73.7,-0.011) 62(76.2,-0.011)
SO-G3#1 [mm]
  rect 0.85x1.3 smd: 1(-0.948,-1.102) 2(0.952,-1.102) 3(0.002,1.098)
  silkscreen extent -2.77,-2.15 2,2.15
SO-G3#2 [mm]
  rect 0.85x1.3 smd: 1(-0.944,-1.105) 2(0.956,-1.105) 3(0.006,1.095)
  silkscreen extent -2.77,-2.16 2.01,2.14
SO-G5/P.95#1 [mm]
  rect 0.55x1.45 smd: 1(-0.95,-1.075) 2(0,-1.075) 3(0.95,-1.075) 4(0.95,1.075) 5(-0.95,1.075)
  silkscreen extent -2.42,-2.2 1.65,2.2
SO-G5/P.95#2 [mm]
  rect 0.55x1.45 smd: 1(-0.942,-1.066) 2(0.008,-1.066) 3(0.958,-1.066) 4(0.958,1.084) 5(-0.942,1.084)
  silkscreen extent -2.42,-2.19 1.66,2.21
SO-G8#1 [mm]
  rect 0.6x2.2 smd: 1(-1.902,-2.611) 2(-0.632,-2.611) 3(0.638,-2.611) 4(1.908,-2.611) 5(1.908,2.589) 6(0.638,2.589) 7(-0.632,2.589) 8(-1.902,2.589)
  silkscreen extent -2.88,-2.74 2.5,1.09
SO-G8#2 [mm]
  rect 0.6x2.2 smd: 1(-1.905,-2.6) 2(-0.635,-2.6) 3(0.635,-2.6) 4(1.905,-2.6) 5(1.905,2.6) 6(0.635,2.6) 7(-0.635,2.6) 8(-1.905,2.6)
  silkscreen extent -2.88,-2.72 2.5,1.1
SO-G8/D5 [mm]
  rect 0.6x1.7 smd: 1(-1.91,-2.846) 2(-0.64,-2.846) 3(0.63,-2.846) 4(1.9,-2.846) 5(1.9,2.854) 6(0.63,2.854) 7(-0.64,2.854) 8(-1.91,2.854)
  silkscreen extent -2.89,-2.97 2.49,1.6
SO-G16 [mm]
  rect 0.6x2.2 smd: 1(-4.453,-2.589) 2(-3.183,-2.589) 3(-1.913,-2.589) 4(-0.643,-2.589) 5(0.627,-2.589) 6(1.897,-2.589) 7(3.167,-2.589) 8(4.437,-2.589) 9(4.437,2.611) 10(3.167,2.611) 11(1.897,2.611) 12(0.627,2.611) 13(-0.643,2.611) 14(-1.913,2.611) 15(-3.183,2.611) 16(-4.453,2.611)
  silkscreen extent -5.43,-2.71 4.99,1.11
SO-G16/C5.85#1 [mm]
  rect 0.6x1.55 smd: 1(-4.452,-2.93) 2(-3.182,-2.93) 3(-1.912,-2.93) 4(-0.642,-2.93) 5(0.628,-2.93) 6(1.898,-2.93) 7(3.168,-2.93) 8(4.438,-2.93) 9(4.438,2.92) 10(3.168,2.92) 11(1.898,2.92) 12(0.628,2.92) 13(-0.642,2.92) 14(-1.912,2.92) 15(-3.182,2.92) 16(-4.452,2.92)
  silkscreen extent -5.4,-3.05 4.99,1.75
SO-G16/C5.85#2 [mm]
  rect 0.6x1.55 smd: 1(-4.445,-2.925) 2(-3.175,-2.925) 3(-1.905,-2.925) 4(-0.635,-2.925) 5(0.635,-2.925) 6(1.905,-2.925) 7(3.175,-2.925) 8(4.445,-2.925) 9(4.445,2.925) 10(3.175,2.925) 11(1.905,2.925) 12(0.635,2.925) 13(-0.635,2.925) 14(-1.905,2.925) 15(-3.175,2.925) 16(-4.445,2.925)
  silkscreen extent -5.39,-3.05 5,1.75
SWT-6 [mm]
  rect 1.5x1.5 hole 0.95: 1(-0.009,-0.001)
  round 1.5 hole 0.95: 1(5.991,-0.001) 2(-0.009,-5.001) 2(5.991,-5.001)
  silkscreen extent -0.01,-5.5 5.99,0.5
SWT-9 [mm]
  rect 1.6x1.6 hole 1.1: 1(-0.009,-0.003)
  round 1.6 hole 1.1: 1(12.491,-0.003) 2(-0.009,-5.083) 2(12.491,-5.003)
  silkscreen extent 0.99,-7.5 11.49,2.5
trans_ring1 [mm]
  round 2 hole 1: 1(7.6,28.15) 2(1.1,30.3) 3(-19.95,14.1) 4(-19.95,-0.8) 5(-19.95,4.25) 6(-19.95,9.15) 8(-12.55,-18.3) 9(-17.5,-18.3) 10(-20.05,-13.3)
  round 2 hole 1 unplated: 7(-20.05,-8.25)
  silkscreen extent -15.24,-15.25 15.24,15.23
WG1232D [mm]
  rect 1x2 hole 0.7: 1(-7.99,13.075)
  oval 1x2 hole 0.7: 2(-6.72,13.075) 3(-5.45,13.075) 4(-4.18,13.075) 5(-2.91,13.075) 6(-1.64,13.075) 7(-0.37,13.075) 8(0.9,13.075) 9(2.17,13.075) 10(3.44,13.075) 11(4.71,13.075) 12(5.98,13.075) 13(7.25,13.075) 14(8.52,13.075) 15(9.79,13.075) 16(11.06,13.075) 17(12.33,13.075) 18(13.59,13.075)
  silkscreen extent -29.49,-14.62 29.51,14.68

## Part data
A1: library part PJEZ0
BT1: library part Battery, "Multicell Battery"
C1 C2 C3 C4 C5 C6 C7 C8 C9 C10 C11 C12 C13 C14 C15 C16 C17 C18 C21 C22 C23 C24 C25 C26 C27 C28 C29 C30 C31 C32 C33 C34 C35 C36 C37 C38 C39 C40 C41 C42 C43 C44 C45 C46 C47 C48 C49 C50 C51 C52 C53 C54 C55 C109 C111 C114 C117 C301 C302 C303 C304: library part "Cap Semi", "Capacitor (Semiconductor SIM Model)"
C19 C20 C56 C57 C58 C59 C100 C101 C102 C103 C104 C105 C106 C107 C108 C110: library part "Cap Pol1", "Polarized Capacitor (Radial)"
D1 D3 D4 D5 D7 D8: library part "D Zener", "Zener Diode"
D2 D6: library part Diode, "Default Diode"
D100 D101 D102 D103 D104 D105 D106: library part 10BQ015, "Schottky Rectifier"
FU100: library part FUSE
J2: library part "D Connector 9", "Receptacle Assembly, 9 Position, Right Angle"
JP1: "Header, 30-Pin, Dual row"
JP2: "Header, 3-Pin,  Right Angle"
JP3: "Header, 3-Pin"
JP4: library part "Header 15H", "Header, 15-Pin, Right Angle"
JP5: library part "Header 15", "Header, 15-Pin"
JP6: "Header, 2-Pin,  Right Angle"
JP7 JP8: library part "Header 3", "Header, 3-Pin"
JP9: "Header, 2-Pin"
K1: library part BS115, "Single-Pole Dual-Throw Relay"
L100 L101 L102: library part "Inductor Konstr 2", "Magnetic-Core Inductor"
Q1 Q6: library part GT122
Q2 Q3 Q4 Q7: library part IRFR120, "HEXFET N-Channel Power MOSFET"
Q5: "HEXFET Power MOSFET"
Q100 Q101: "HEXFET N-Channel Power MOSFET"
R1 R2 R3 R4 R5 R6 R7 R8 R9 R10 R11 R12 R13 R14 R15 R16 R17 R18 R19 R20 R21 R22 R23 R24 R25 R26 R27 R28 R29 R33 R34 R35 R36 R37 R38 R39 R40 R41 R42 R43 R44 R45 R47 R48 R49 R50 R51 R52 R53 R54 R55 R56 R57 R58 R59 R60 R61 R62 R63 R64 R65 R66 R67 R71 R72 R73 R74 R75 R76 R77 R78 R81 R82 R83 R84 R85 R86 R87 R88 R89 R90 R91 R92 R93 R94 R95 R96 R97 R98 R99 R100 R101 R102 R103 R104 R105 R106 R107 R108 R109 R110 R111 R112 R113 R114 R115 R116 R117 R118 R119 R120 R121 R122 R123 R124 R125 R126 R127 R128 R129 R301 R302 R303 R304 R305 R306: library part Res2, "Resistor"
S1 S2 S3 S4 S5: "Switch"
S6: library part SWT-9, "Button"
T100: library part TRANS_RING1
U4 U10 U11: "8-Channel Analog Multiplexer/Demultiplexer"
U6: library part KXO-97
U9: "Ultra-Low Offset Voltage Operational Amplifier"
U13: "Reset IC"
U14: "+5V Powered, Multi-Channel RS-232 Driver/Receiver"
U19: library part LP2980AIM5-3.3, "Micropower SOT, 50 mA Ultra Low-Dropout Regulator"
U100: "Self-Oscillating Half-Bridge Driver"
U101: "3-Terminal Positive Fixed Voltage Regulator"
U102: "Negative Voltage Regulator"
U103: "3-Terminal Low-Current Positive Fixed Voltage Regulator"
U104: "800mA and 1A Low Dropout Positive Regulator 2.85V, 3.3V, 5V, and Adjustable"
Y1 Y2: library part XTAL, "Crystal Oscillator"

## Free pads (board coordinates)
  round 6 hole 3: 0(37.5,36) 0(37.5,120) 0(70,5) 0(70,130) 0(145,5) 0(145,130) 0(222.5,5.05) 0(222.5,129.95)

## Via types
v1: diameter 1.1, hole 0.6, Top Layer to Bottom Layer, 795 vias
v2: diameter 3, hole 2, Top Layer to Bottom Layer, 1 vias

## Nets (pads, with @x,y where several pads share a name; then routed paths per layer and width w, separated by ;. In a path a pad name is that pad's centre, name@x,y a point inside that pad or via, vN(x,y) a via of type N, cw(c..) or ccw(c..) an arc to the next point about the centre after c; other vN are vias at no path point)
+3V3: C12.1 C34.1 C36.2 C37.2 C38.2 C39.2 C58.1 C110.1 C301.2 C302.2 C303.2 C304.2 J301.4 J301.5 J301.9 J301.12 JP1.21 JP1.22 JP4.16 R33.2 R37.2 R38.2 R39.2 R42.2 R44.2 R45.2 R51.2 R81.2 R82.1 R301.2 R302.1 R303.2 R304.1 U1.13 U1.28 U1.42 U1.54 U1.71 U1.84 U1.96 U3.22 U3.32 U3.48 U4.16 U10.16 U11.16 U13.5 U104.4 | length 629.1
  Top Layer w0.25: U1.28@79.084,71.756 v1(80.779,73.45) ; U1.13@82.62,79.18 v1(84.5,77.3) ; U1.42@84.034,66.806 85.978,68.75 v1(86,68.75) ; U3.22@85.972,107.922 87.3,109.249 v1(87.3,109.75) ; v1(87.25,115.05) 87.8,116.113 U3.48@88.695,117.008 ; v1(88.2,66.55) 88.886,66.55 U1.54@90.398,65.038 ; v1(88.85,80.1) 88.85,80.107 U1.96@90.752,82.009 ; v1@89.75,111.1 v1(89.759,111.1) U3.32@91.17,109.69 ; v1(92.95,75.7) 92.95,75.722 U1.84@94.994,77.766 ; v1(94.1,72.65) 94.807,72.65 U1.71@96.409,71.048 ; R33.2@107.45,114.231 R33.2@107.788,113.893 ; R51.2@107.45,116.456 R51.2@107.788,116.793
  Top Layer w0.4: v1(48,115.8) 48.035,115.765 J301.5@57.75,115.765 ; v1(57.3,75.5) 57.3,77.2 60,79.9 JP4.16@60,80.6 ; C34.1@57.385,25.809 57.385,27.486 v1(57.45,27.55) ; C304.2@57.55,126.55 57.6,126.5 v1(57.6,124.55) ; v1@57.65,108 57.7,107.95 C302.2@57.7,106.3 ; C34.1@57.825,26.375 U13.5@59.75,26.375 ; J301.4@60.25,117.1 60.25,117.085 65.121,117.085 R301.2@66.543,115.662 ; v1(61.7,72.8) 61.9,72.6 63.65,72.6 65.65,70.6 71.8,70.6 v1(75,73.8) ; 71.35,114 73.95,114 74.95,113 81.45,113 v1@81.75,112.7 ; C37.2@87.693,120.212 87.693,118.556 v1(87.7,118.55) ; 87.888,86.893 88.893,86.893 v1(88.9,86.9) ; v1(88,62.7) 88.007,62.693 C38.2@88.007,60.588 ; v1(107.45,111.05) 107.788,111.388 R51.2@107.788,116.793 ; U11.16@118.625,31.245 126.645,31.245 v1(127.05,31.65) ; v1(176.4,31.25) 176.405,31.245 U10.16@177.925,31.245 ; U4.16@202.92,31.252 204.348,31.252 204.55,31.05 v1(207.65,31.05)
  Top Layer w0.6: R81.2@71.65,99.45 73.75,99.45 R42.2@75.3,101 ; v1(74.85,105) 75.312,104.538 R42.2@75.312,100.607 ; v1(87.577,105.877) 87.577,104.129 C12.1@87.593,104.112 ; v1(93.55,112.05) 94.7,110.9 107.3,110.9 v1(107.45,111.05)
  Top Layer w0.7: v1(108.95,74.95) 110,73.9 131.8,73.9 135.75,69.95 203.1,69.95 210.75,77.6 JP1.21@233.589,77.6
  Top Layer w0.8: v1(98.8,73.75) 100.7,73.75 101.9,74.95 v1(108.95,74.95)
  Top Layer w1: R37.2@105.688,93.293 105.794,93.4 v1(107.45,93.4) ; R38.2@105.694,96 v1(107.45,96) ; R82.1@105.712,98.807 105.769,98.75 v1(107.45,98.75) ; R39.2@105.788,106.493 v1(107.443,106.493) ; v1(107.45,127.3) 114.95,127.3 117.05,129.4 122.97,129.4 125.07,127.3 131.8,127.3 136.85,122.25 141.95,122.25 U104.4@146.407,117.793 146.45,117.835 146.45,121.35 C36.2@148.3,123.2
  Bottom Layer w0.4: J301.9@46.5,122.71 46.5,118 48.02,116.48 J301.12@48.02,110.09 ; v1(57.3,75.5) 56.9,75.1 56.9,40.5 56.55,40.15 56.55,28.45 v1(57.45,27.55) ; v1(57.6,124.55) 59,123.15 59,118.335 J301.4@60.3,117.035 59.03,115.765 J301.5@57.75,115.765 56,114.015 56,110.35 57.65,108.7 v1@57.65,108 ; JP4.16@60,80.6 61.5,79.1 61.5,73 v1(61.7,72.8) ; v1(74.8,113.2) 76.05,111.95 76.05,108.15 75.2,107.3 74.8,107.3 74.25,106.75 74.25,105.5 v1(74.85,105) ; v1(75,73.8) 80.429,73.8 v1(80.779,73.45) ; 88.05,84 88.05,86.05 v1(88.9,86.9) ; v1(125.95,73.9) 125.95,57 127.05,55.9 v1(127.05,31.65) ; v1(176.4,31.25) v1(176.4,69.95) ; v1(207.25,74.1) 207.65,73.7 v1(207.65,31.05)
  Bottom Layer w0.7: v1(227.5,77.6) JP1.22@233.589,77.6
  Bottom Layer w1: v1@93.5,112 v1(93.55,112.05) ; v1@98.8,73.8 100.75,73.8 v1(100.85,73.9) ; v1(107.45,127.3) 107.45,76.45 v1(108.95,74.95)
  other v1: 57.65,108.25 81.75,112.7
+3V3A: C17.2 C33.2 R67.2 U1.10 U1.12 U19.5 | length 128.4
  Top Layer w0.25: R67.2@76.588,13.193 R67.2@76.594,13.2 ; v1(78.3,84.6) 79.321,84.6 U1.10@83.681,80.241 ; 81.234,82.688 80.6,82.054 80.6,81.907 U1.12@82.973,79.534
  Top Layer w0.4: U19.5@60.084,96.942 60.388,97.245 C17.2@60.388,99.693 ; 60.388,98.1 66.95,98.1 67.55,97.5 74.75,97.5 v1(74.95,97.7) ; R67.2@76.588,13.193 77.606,13.193 v1(78.447,12.353) ; v1(78.447,12.353) 78.607,12.193 C33.2@78.607,10.288
  Bottom Layer w0.4: v1(74.95,97.7) 74.95,88.15 78.3,84.8 78.3,83.6 69.5,74.8 69.5,66.05 72.55,63 72.55,55.45 72.7,55.3 72.7,44.7 73.65,43.75 73.65,16.15 76.6,13.2 77.505,13.2 78.4,12.305 v1(78.447,12.353)
+5V: C11.2 C15.2 C56.1 C102.1 JP1.19 JP1.20 JP4.13 JP4.14 K1.4 R17.2 R18.2 R19.2 R50.2 R72.2 R73.1 R115.2 R116.2 R121.2 R123.2 R124.2 R125.2 U5.8 U7.6 U9.7 U12.3 U19.1 U19.3 U101.3 U104.3 | length 596.2
  Top Layer w0.4: v1(57.4,92.95) 57.4,94.95 U19.3@57.5,95.05 ; U19.3@57.634,95.042 56.508,95.042 56.5,95.05 56.5,96.933 56.508,96.942 U19.1@57.634,96.942 ; U9.7@77.982,19.611 77.982,18.368 78.5,17.85 82.7,17.85 83.7,18.85 91.5,18.85 R72.2@91.55,18.8 ; v1(82,49.95) 82.45,49.5 90.65,49.5 92.5,51.35 101.55,51.35 102.85,52.65 103.65,52.65 106.9,55.9 116.5,55.9 116.85,55.55 129.85,55.55 133.75,59.45 v1(133.75,60.35) ; 87.95,18.85 87.995,18.805 C15.2@87.995,16.802 ; U5.8@90.096,24.34 91.59,24.34 v1(91.7,24.45) ; R73.1@91.45,21.3 91.509,21.241 R72.2@91.509,18.714 ; R50.2@107.788,119.693 108.743,119.693 109.1,120.05 v1(109.1,121.8) ; U12.3@118.139,61.662 v1@121.338,61.662 ; v1@121.512,68.662 U7.6@123.339,68.662
  Top Layer w0.6: v1(91.9,15.1) 92.1,15.3 97.422,15.3 97.722,15 134.45,15 134.959,15.509 R121.2@136.786,15.509 ; v1@91.95,15.1 v1@92.05,15 ; 96.35,15.3 96.414,15.236 R116.2@96.414,11.791 ; 105.05,15 105.114,14.936 R115.2@105.114,11.791 ; R19.2@113.914,11.791 113.914,14.914 113.95,14.95 ; R18.2@122.514,11.791 122.514,14.964 122.55,15 ; v1(131.15,15) 131.214,14.936 R17.2@131.214,11.791 ; v1(131.15,23.55) R123.2@136.786,23.55 ; v1@131.159,31.609 R124.2@136.786,31.609
  Top Layer w0.7: v1(110.65,77.4) 112.7,75.35 132.45,75.35 136.45,71.35 202.7,71.35 211.5,80.15 JP1.19@233.4,80.15 ; v1(183.85,34.25) 183.914,34.186 R125.2@183.914,32.991
  Top Layer w1: v1(57.4,92.95) 63.75,92.95 65.55,91.15 108.55,91.15 v1@109.05,91.65 ; v1(109.1,124.45) 109.638,124.988 128.696,124.988 C102.1@129.294,124.389 ; C102.1@129.2,124.4 129.2,118.5 131.8,115.9 132.1,115.9 133.8,115.9 134.157,115.543 140.507,115.543 142.3,113.75 C11.2@142.3,111.9
  Bottom Layer w0.4: v1(91.7,24.45) 91.5,24.25 91.5,17.65 92.05,17.1 v1@92.05,15 ; v1(121.35,61.65) 121.5,61.8 v1(121.5,75.35) ; v1(183.75,71.35) 183.85,71.25 v1(183.85,34.25)
  Bottom Layer w0.6: v1(82,49.95) 82,42.905 K1.4@82.294,42.61 82.294,42.656 K1.4@82.25,42.7 ; v1(131.15,15) 131.15,51.55 133.8,54.2 v1(133.8,74) ; v1(133.75,60.35) v1@133.8,60.3
  Bottom Layer w0.7: v1(109.05,91.7) 109.05,79 v1(110.65,77.4) ; v1@227.475,80.125 JP1.20@233.589,80.125
  Bottom Layer w1: v1(57.4,92.95) 57.4,78.12 JP4.14@60,75.52 JP4.13@60,72.98 ; v1@109.1,91.75 v1(109.1,124.45)
  other v1: 91.5,20 131.15,31.6 121.5,68.65 227.45,80.15
+5VIZ: C14.2 C59.1 C108.1 JP6.1 U103.1 | length 119.9
  Top Layer w1: JP6.1@59.9,130.1 62.05,130.1 63.25,128.9 63.25,127.05 66.85,123.45 73.25,123.45 76.6,126.8 76.6,130.6 78.9,132.9 112.85,132.9 v1(113.35,132.4) ; v1(113.45,86.5) 114.639,85.311 119.739,85.311 121.8,83.25 U103.1@121.8,82.6
  Bottom Layer w1: v1(113.35,132.4) 113.45,132.3 v1(113.45,86.5)
+48V: FU100.1 JP1.5 JP1.6 R56.2 | length 51
  Top Layer w0.4: R56.2@217.788,102.093 220.031,99.85 223.7,99.85 v1(225.3,98.25)
  Top Layer w1: v1(215.8,116.75) 217.3,116.75 v1(217.4,116.65) ; v1(225.3,98.25) 225.625,97.925 JP1.5@233.589,97.925
  Bottom Layer w1: v1(215.8,116.75) 217.45,116.75 217.475,116.725 223.15,111.05 223.15,100.45 225.675,97.925 JP1.6@233.589,97.925